# Altium PCB PCB1.PcbDoc
Units mil, origin at the board's own origin, x right, y up, seen from the top; angles counter-clockwise.
Board outline 3346.46 x 3543.31 mil, 4 copper layers (Top Layer, Int1 (PWR), Int2 (GND), Bottom Layer), stack 65.386 mil thick; 29 components, 10 nets, 76 pads, 1 vias.
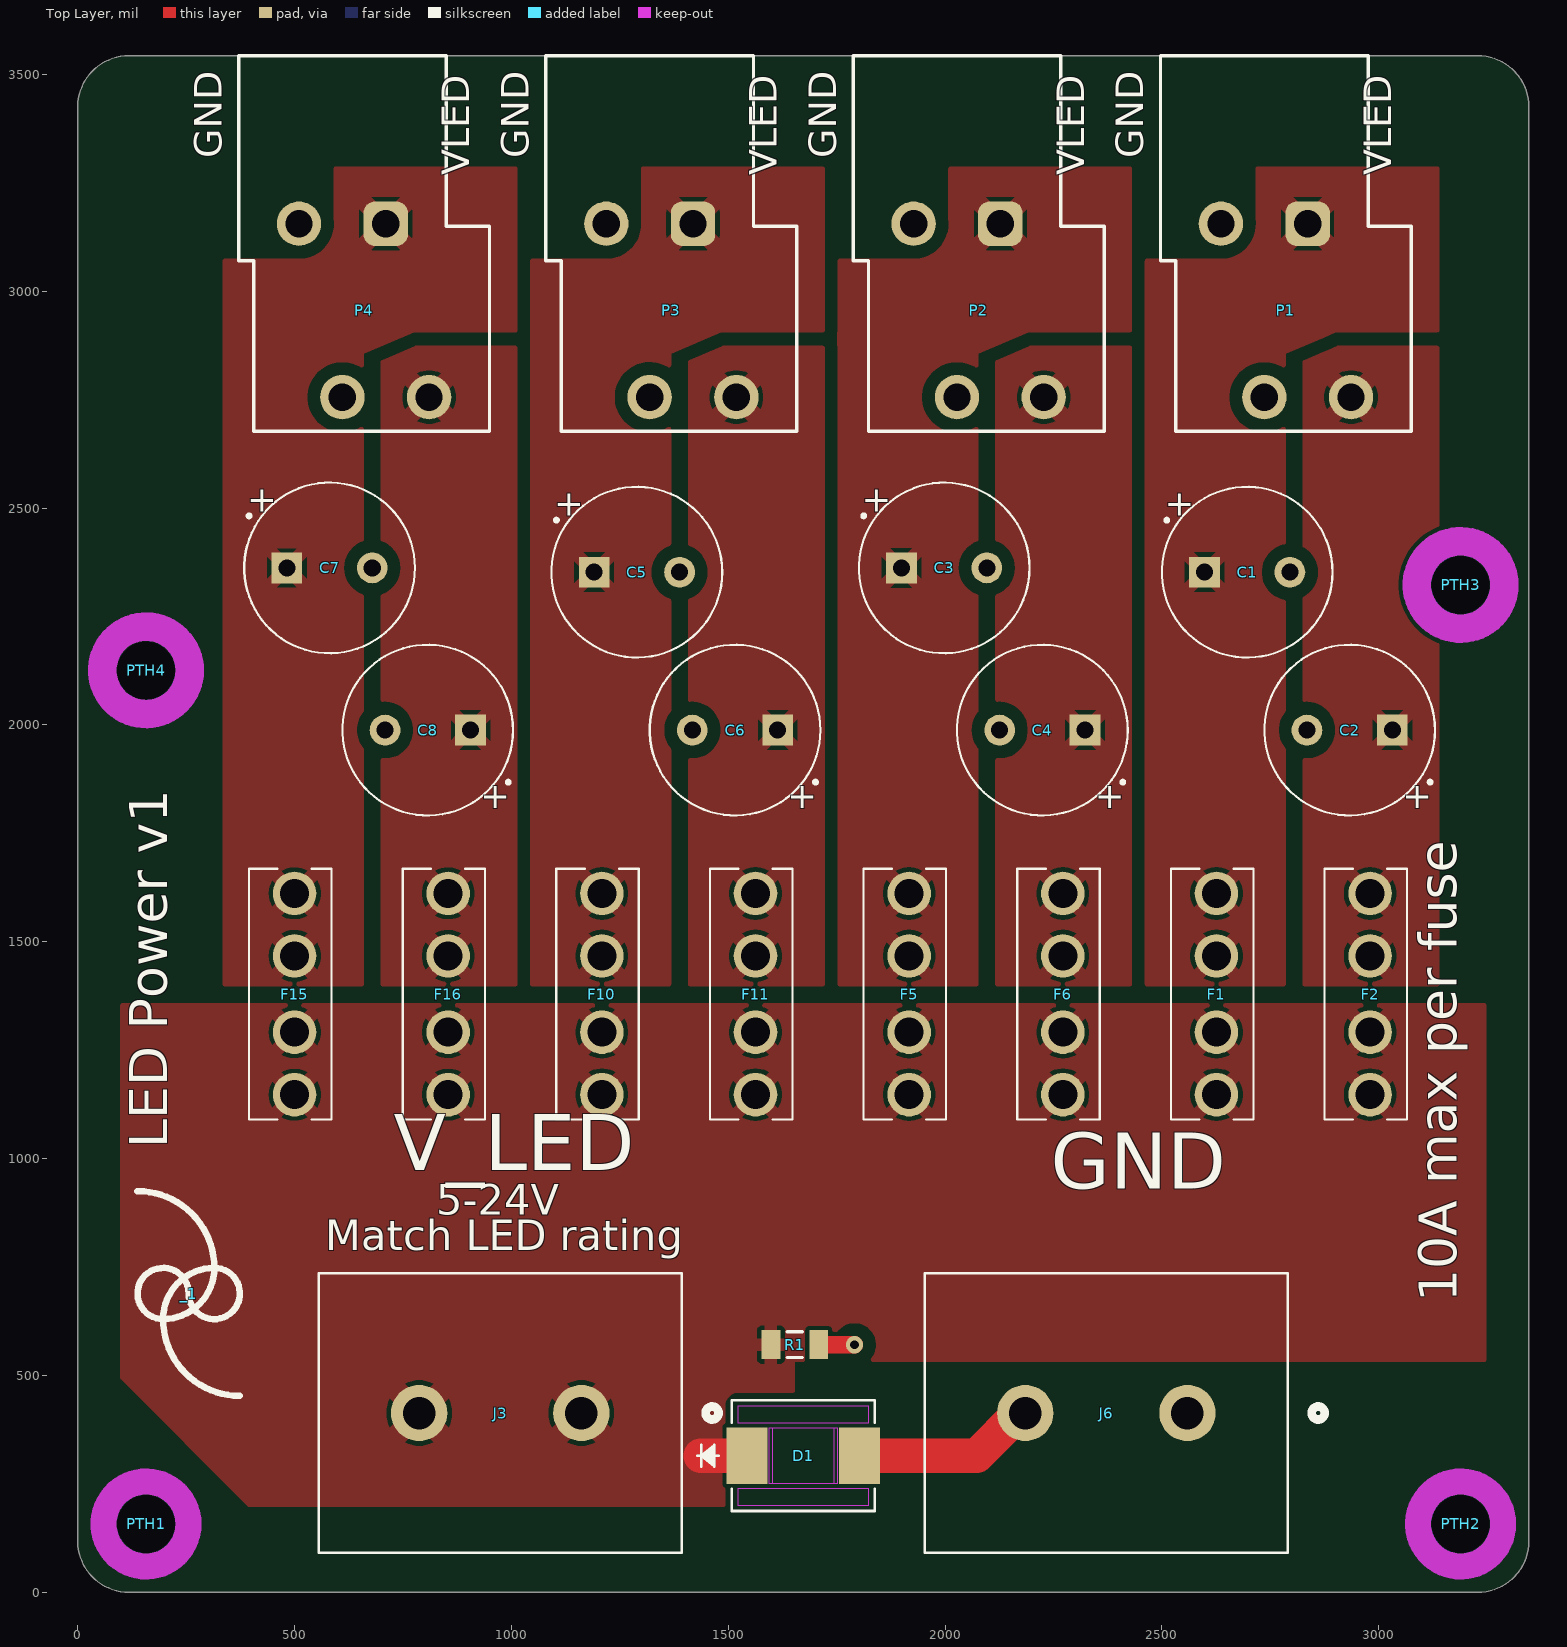
[diagram p0: Top Layer view]
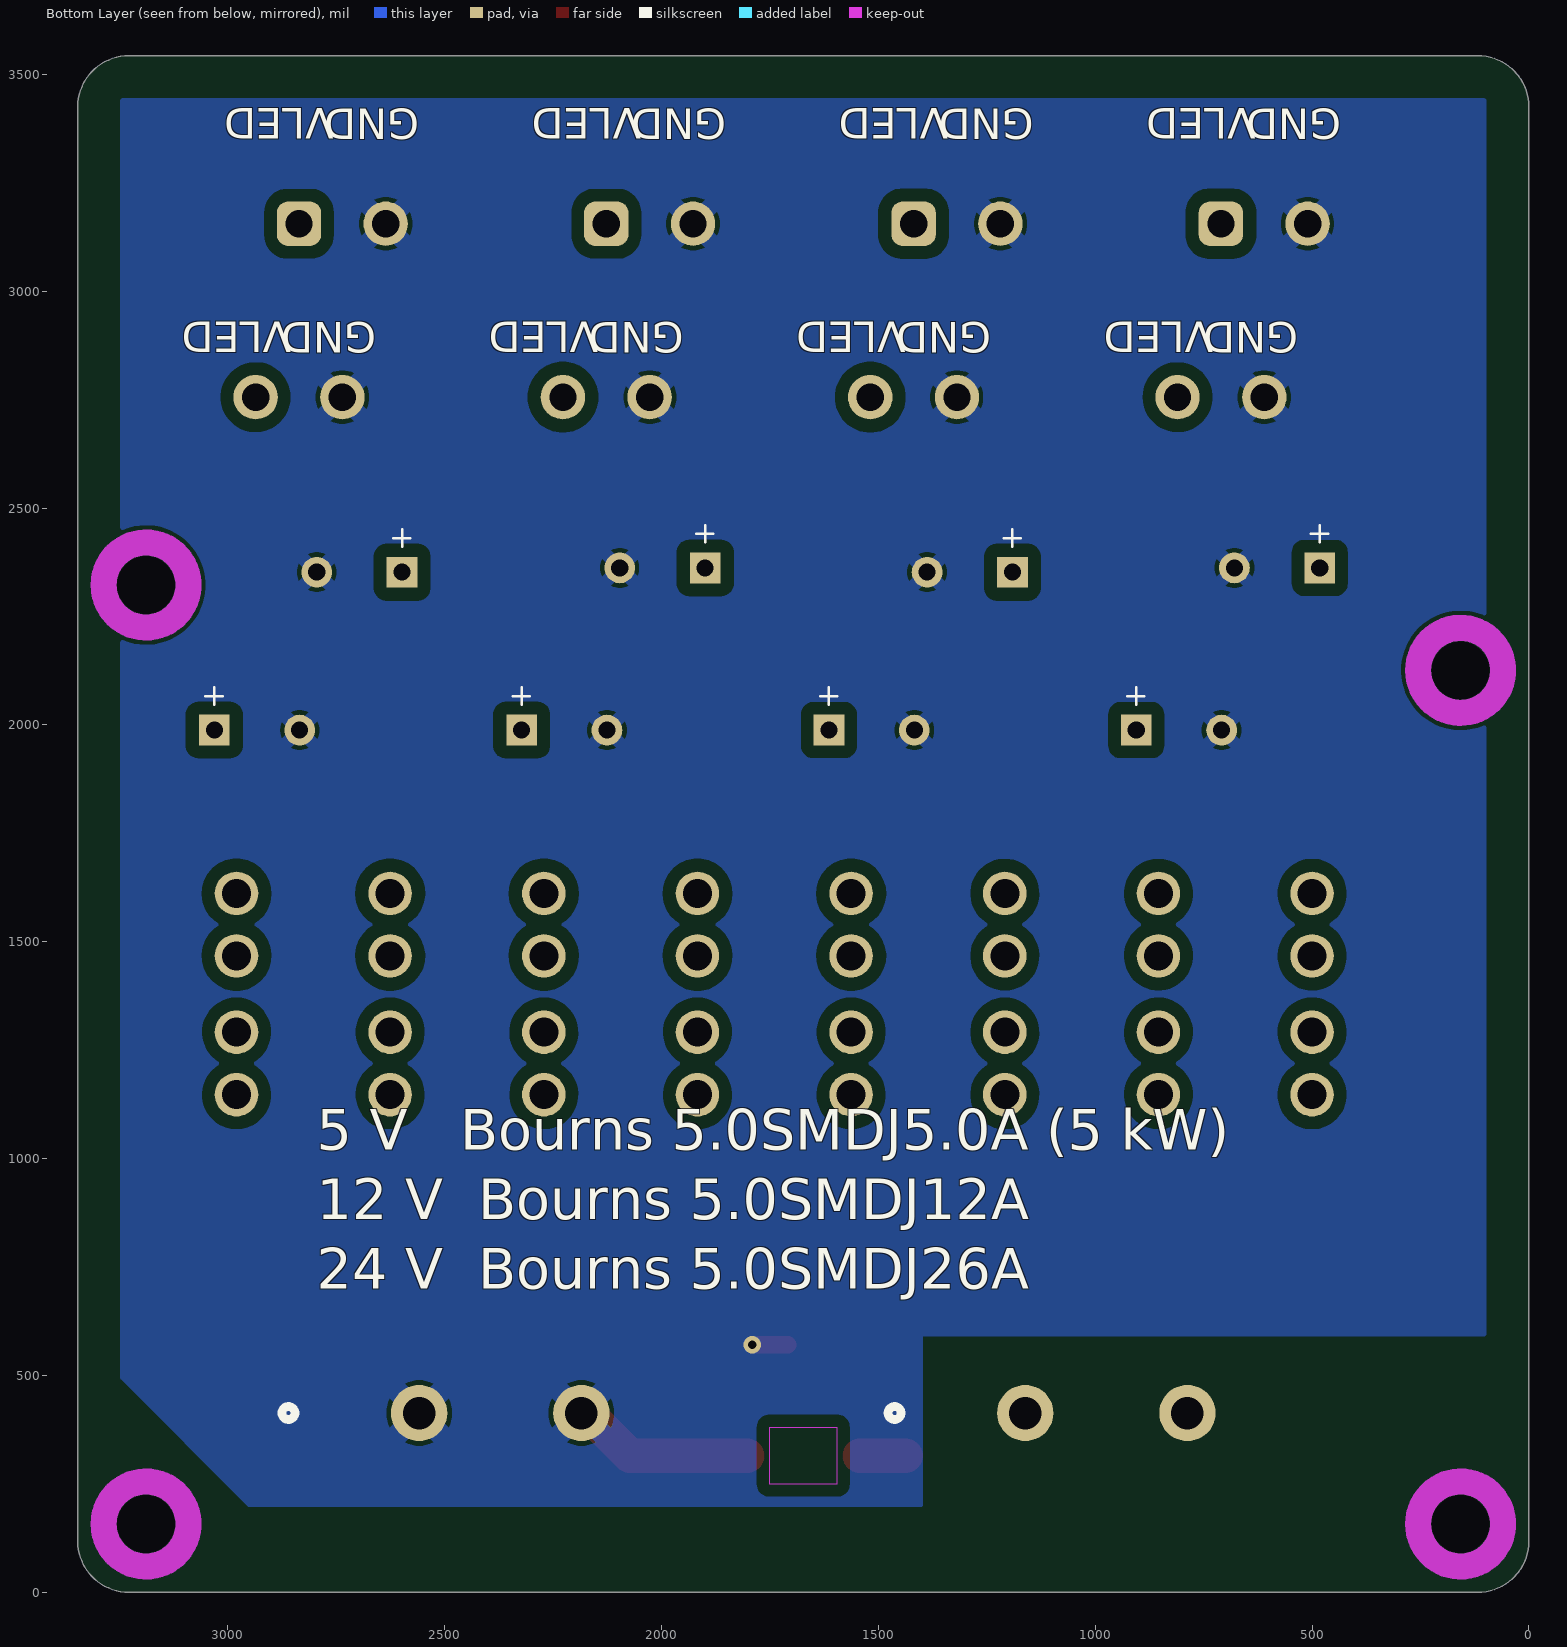
[diagram p1: Bottom Layer view, seen from below]
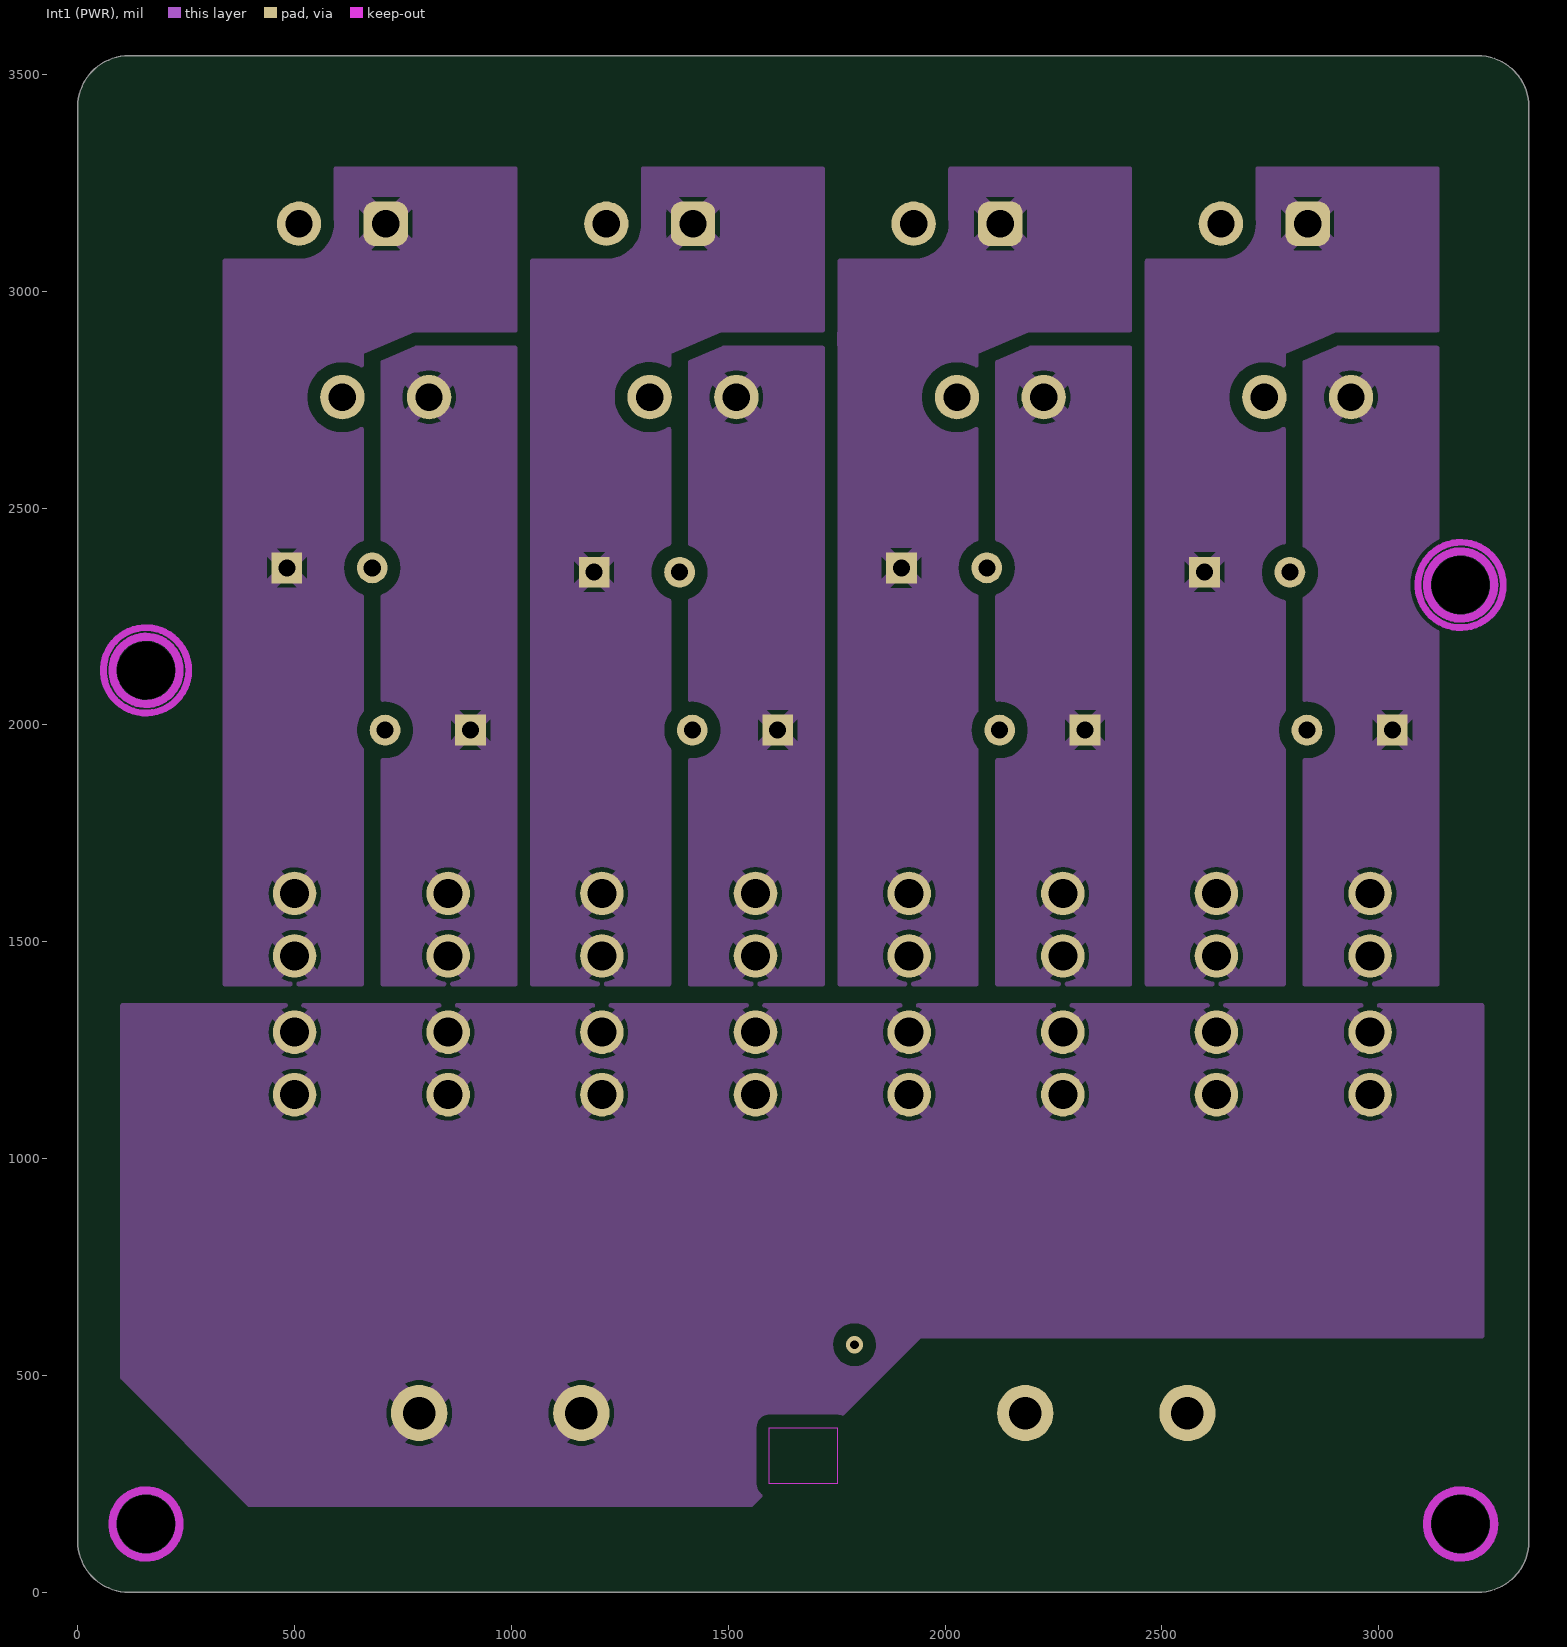
[diagram p2: Int1 (PWR)]
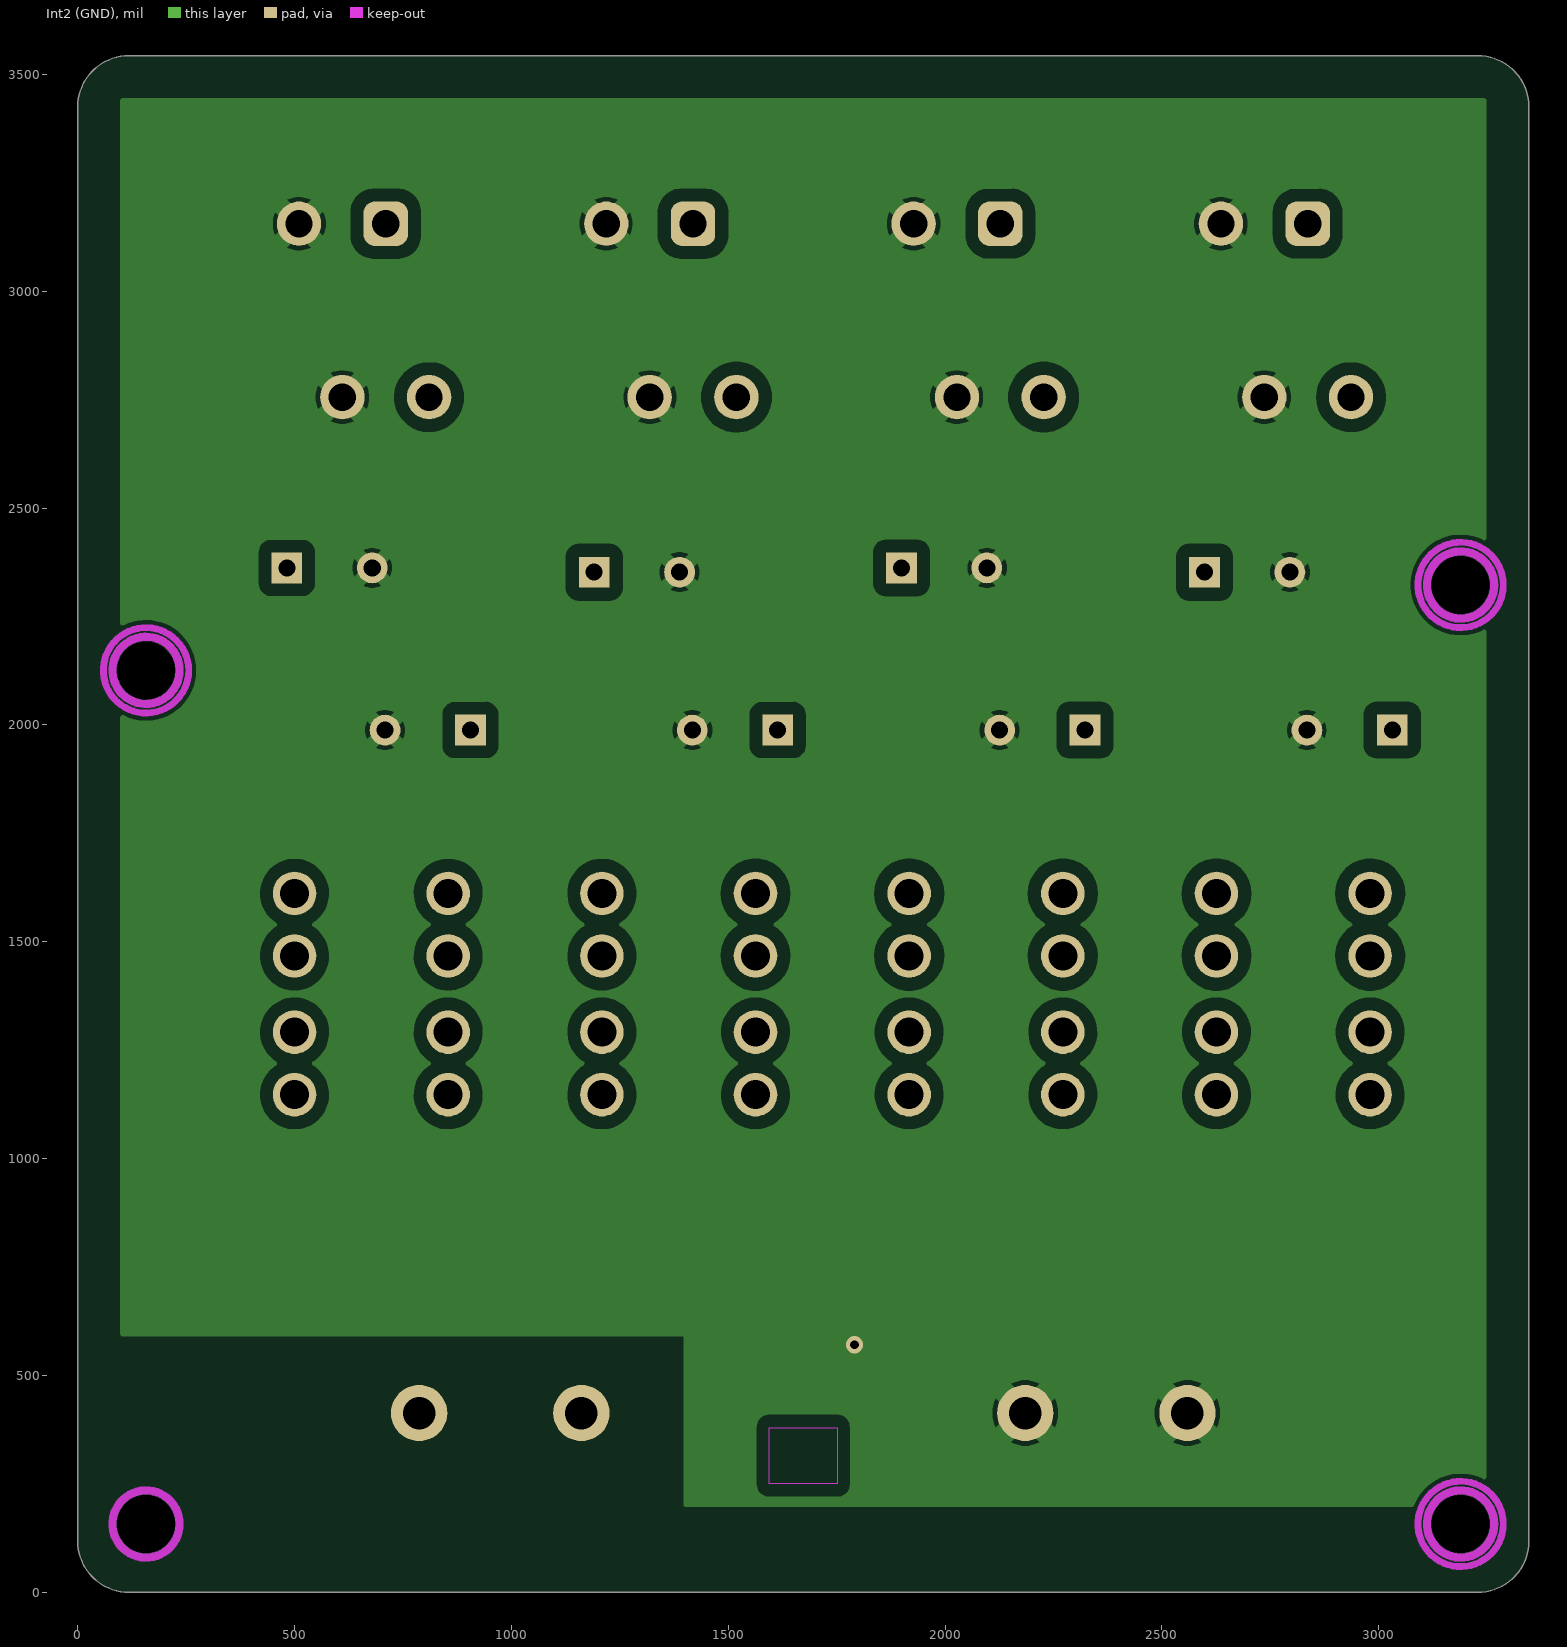
[diagram p3: Int2 (GND)]
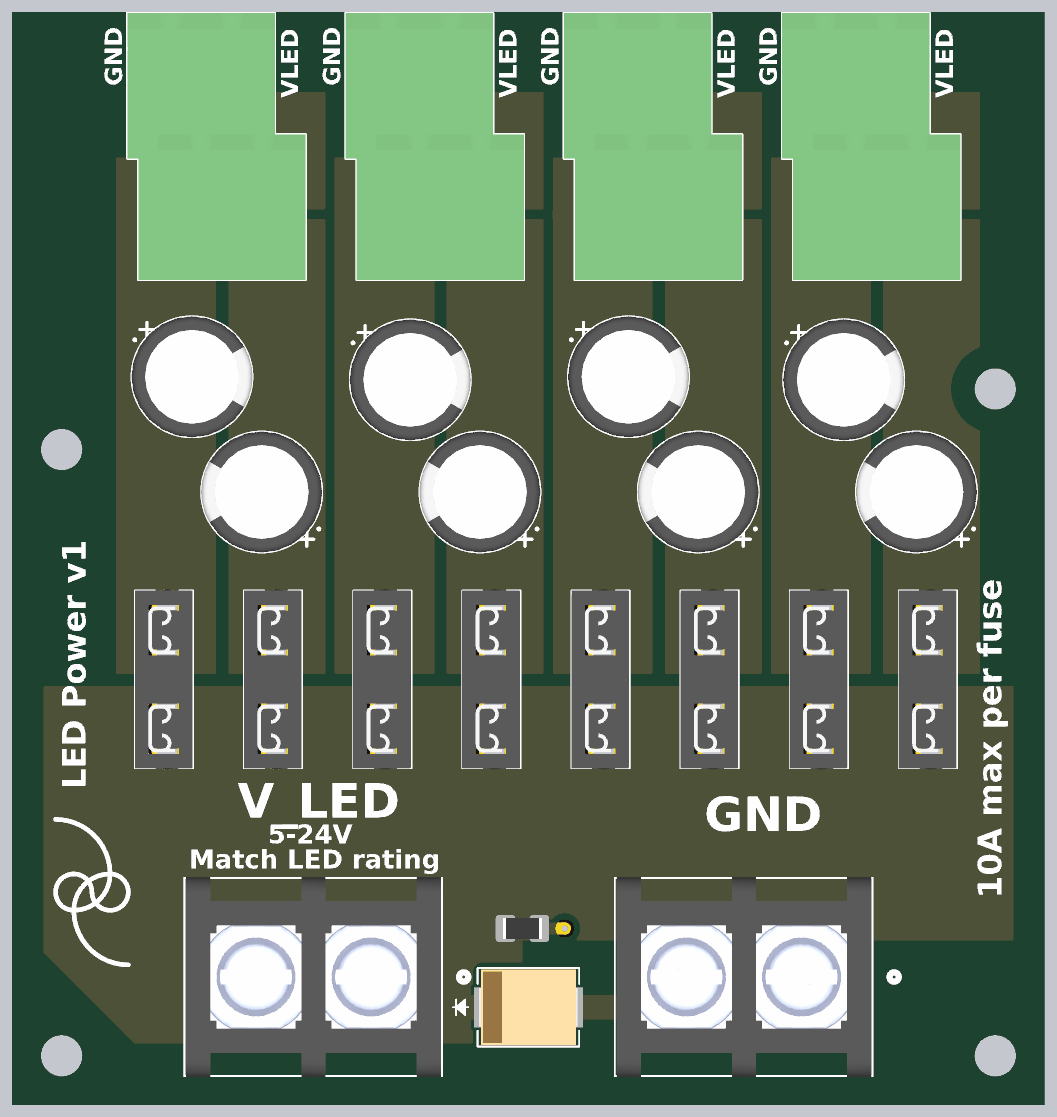
[diagram p4: 3D render of the assembled board from above, using the file's embedded part models]

## Layer stack, top to bottom
Top Solder: solder mask 1, SM-001, Dk 4
Top Layer: signal copper 2.7559
Dielectric 1: prepreg 8.2835, PP-017, Dk 4.3
Int1 (PWR): signal copper 0.689
Dielectric 3: core 41.9291, Core-039, Dk 4.8
Int2 (GND): signal copper 0.689
Dielectric 5: prepreg 8.2835, PP-017, Dk 4.3
Bottom Layer: signal copper 2.7559
Bottom Solder: solder mask 1, SM-001, Dk 4

## Board outline
0,118.11 ccw(c118.11,118.11) 118.11,0 3228.35,0 ccw(c3228.35,118.11) 3346.46,118.11 3346.46,3425.2 ccw(c3228.35,3425.2) 3228.35,3543.31 118.11,3543.31 ccw(c118.11,3425.2) 0,3425.2

## Design rules (kind name [scope] priority, off if disabled: settings)
Clearance [All] p1: gap=10 ignorepadtopadclearanceinfootprint=FALSE except(30: THPad-Fill THPad-Poly THPad-Region Via-Fill Via-Poly Via-Region Fill-Fill Fill-Poly Fill-Region Poly-Poly Poly-Region Region-Region)
DiffPairsRouting [All] p1: maxlimit=10 minlimit=10 mostfreqgap=10 toplayer_minwidth=10 toplayer_maxwidth=10 toplayer_prefwidth=10 midlayer1_minwidth=10 midlayer1_maxwidth=10 midlayer1_prefwidth=10 midlayer2_minwidth=10 midlayer2_maxwidth=10 midlayer2_prefwidth=10 bottomlayer_minwidth=10 bottomlayer_maxwidth=10 bottomlayer_prefwidth=10 maxuncoupledlength=500
HoleSize [All] p1: absolutevalues=TRUE maxlimit=300 minlimit=10 maxpercent=80.000 minpercent=20.000
MinimumAnnularRing [All] p1: minimumring=10
PasteMaskExpansion [All] p1: expansion=10
PlaneClearance [All] p1: clearance=15
PlaneConnect [All] p1: pad.planeconnectstyle=Relief pad.reliefexpansion=20 pad.reliefentries=4 pad.reliefconductorwidth=10 pad.reliefairgap=10 via.planeconnectstyle=Direct via.reliefexpansion=20 via.reliefentries=4 via.reliefconductorwidth=10 via.reliefairgap=10
PolygonConnect PolygonConnect_1 [HasFootprint('OSTYK51102030-Footprint-1')] p1: thpad.connectstyle=Relief thpad.reliefconductorwidth=50 thpad.reliefentries=4 thpad.polygonreliefangle="45 Angle" thpad.airgapwidth=10 smdpad.connectstyle=Relief smdpad.reliefconductorwidth=50 smdpad.reliefentries=4 smdpad.polygonreliefangle="90 Angle" smdpad.airgapwidth=10 via.connectstyle=Direct via.reliefconductorwidth=10 via.reliefentries=4 via.polygonreliefangle="90 Angle" via.airgapwidth=10
PolygonConnect PolygonConnect_2 [HasFootprint('691319510004')] p2: thpad.connectstyle=Relief thpad.reliefconductorwidth=40 thpad.reliefentries=4 thpad.polygonreliefangle="45 Angle" thpad.airgapwidth=10 smdpad.connectstyle=Relief smdpad.reliefconductorwidth=40 smdpad.reliefentries=4 smdpad.polygonreliefangle="90 Angle" smdpad.airgapwidth=10 via.connectstyle=Direct via.reliefconductorwidth=10 via.reliefentries=4 via.polygonreliefangle="90 Angle" via.airgapwidth=10
PolygonConnect [All] p3: thpad.connectstyle=Relief thpad.reliefconductorwidth=30 thpad.reliefentries=4 thpad.polygonreliefangle="45 Angle" thpad.airgapwidth=10 smdpad.connectstyle=Relief smdpad.reliefconductorwidth=30 smdpad.reliefentries=4 smdpad.polygonreliefangle="90 Angle" smdpad.airgapwidth=10 via.connectstyle=Direct via.reliefconductorwidth=10 via.reliefentries=4 via.polygonreliefangle="90 Angle" via.airgapwidth=10
RoutingVias [All] p1: holewidth=10 width=20 viastyle="Through Hole" minholewidth=10 minwidth=20 maxholewidth=10 maxwidth=20
SMDNeckDown [All] p1: percent=100.000
SilkToSolderMaskClearance SilkscreenOverComponentPads [IsPad] p1: minsilkscreentomaskgap=10 clearancetoexposedcopper=TRUE
SolderMaskExpansion [All] p1: expansion=10 istentingtop=FALSE
SupplyNets "Schematic Supply Nets_1" [InNet('V_LED')] p1: voltage=0.000
SupplyNets "Schematic Supply Nets" [InNet('GND')] p2: voltage=0.000
Width [All] p1: maxlimit=250 minlimit=10 preferedwidth=10 midlayer1_maxwidth=10 midlayer2_maxwidth=10 minimp=50.000000 maximp=50.000000 favimp=50.000000
24 further rules are at their usual default settings.

## Components (designator, comment, footprint, x,y, rotation, side; value= is the part's Value field where it differs from the comment)
_1 "Z Logo" "Z Logo 0.5\"" 255.91,688.98 r90 top
C1 "REH1020471M050K" CAP_POL_DIAM10_H22_SPACING5 2696.85,2352.36 r0 top value=470µF
C2 "REH1020471M050K" CAP_POL_DIAM10_H22_SPACING5 2933.07,1988.19 r180 top value=470µF
C3 "REH1020471M050K" CAP_POL_DIAM10_H22_SPACING5 1998.03,2362.2 r0 top value=470µF
C4 "REH1020471M050K" CAP_POL_DIAM10_H22_SPACING5 2224.41,1988.19 r180 top value=470µF
C5 "REH1020471M050K" CAP_POL_DIAM10_H22_SPACING5 1289.37,2352.36 r0 top value=470µF
C6 "REH1020471M050K" CAP_POL_DIAM10_H22_SPACING5 1515.75,1988.19 r180 top value=470µF
C7 "REH1020471M050K" CAP_POL_DIAM10_H22_SPACING5 580.71,2362.2 r0 top value=470µF
C8 "REH1020471M050K" CAP_POL_DIAM10_H22_SPACING5 807.09,1988.19 r180 top value=470µF
D1 "5.0SMDJ5.0A" SMDJ_DO-214AB 1673.23,314.96 r0 top
F1 "3544-2" 3544-2-Footprint-1 2625.98,1379.53 r270 top
F2 "3544-2" 3544-2-Footprint-1 2980.32,1379.53 r270 top
F5 "3544-2" 3544-2-Footprint-1 1917.32,1379.53 r270 top
F6 "3544-2" 3544-2-Footprint-1 2271.65,1379.53 r270 top
F10 "3544-2" 3544-2-Footprint-1 1208.66,1379.53 r270 top
F11 "3544-2" 3544-2-Footprint-1 1562.99,1379.53 r270 top
F15 "3544-2" 3544-2-Footprint-1 500,1379.53 r270 top
F16 "3544-2" 3544-2-Footprint-1 854.33,1379.53 r270 top
J3 "OSTYK51102030" OSTYK51102030-Footprint-1 1161.42,413.39 r180 top
J6 "OSTYK51102030" OSTYK51102030-Footprint-1 2559.06,413.39 r180 top
P1 "691319510004" 691319510004 2786.22,3110.24 r180 top
P2 "691319510004" 691319510004 2077.56,3110.24 r180 top
P3 "691319510004" 691319510004 1368.9,3110.24 r180 top
P4 "691319510004" 691319510004 660.24,3110.24 r180 top
PTH1 "Mounting Hole NPTH" "Mounting Hole M3 No Washer NPTH" 157.48,157.48 r0 top
PTH2 "Mounting Hole NPTH" "Mounting Hole M3 No Washer NPTH" 3188.98,157.48 r0 top
PTH3 "Mounting Hole NPTH" "Mounting Hole M3 No Washer NPTH" 3188.98,2322.83 r0 top
PTH4 "Mounting Hole NPTH" "Mounting Hole M3 No Washer NPTH" 157.48,2125.98 r0 top
R1 "RC1206FR-0710KL" RESC3116X06N_1206MED 1653.54,570.87 r0 top value=10k

## Footprints (in the part's own frame and the unit in brackets; to place one, negate y for a bottom-side part, rotate by r counter-clockwise, add the part's x,y. Pads: shape width x height; smd on the part's side, far side on the other; paste and mask are expansions set on the pad)
3544-2-Footprint-1 [mm]
  round 2.55 hole 1.7: 1(-5.895,0) 2(-2.235,0) 3(2.235,0) 4(5.895,0)
  silkscreen extent -7.34,-2.67 7.34,2.16, body extent -7.34,-2.67 7.34,2.08, height 8.83
691319510004 [mm] "Double Level Horizontal Male PCB Header with closed Flanges, pitch 5.08mm, 04p"
  rrect50% 2.6x2.6 hole 1.6: 1(-1.27,-1.16)
  round 2.6 hole 1.6: 2(3.81,-1.16) 3(-3.81,9) 4(1.27,9)
  silkscreen extent -7.35,-11 7.35,11, body extent -7.35,-11 7.35,11, height 23.75
CAP_POL_DIAM10_H22_SPACING5 [mm] "Diameter 8mm / Height 22mm / Lead Spacing 5mm"
  rect 1.8x1.8 hole 1: 1(-2.5,0)
  round 1.8 hole 1: 2(2.5,0)
  silkscreen extent -5,-5 5,5, body extent -5,-5 5,5, height 20
"Mounting Hole M3 No Washer NPTH" [mil] "Mounting Hole"
  round 0 hole 134 unplated: 1(0,0)
  Top Layer keep-out circle w60: c0,0 r98
  Bottom Layer keep-out circle w60: c0,0 r98
  Keep-Out Layer circle w19: c0,0 r77.5
OSTYK51102030-Footprint-1 [mil]
  round 130 hole 75 paste-99999 mask+0: 1(0,0) 2(374.02,0)
  silkscreen extent -316,-322 606,322, body extent -227,-325 599,325, height 733
RESC3116X06N_1206MED [mm] "Chip Resistor, 2-Leads, Body 3.10x1.60mm, IPC Medium Density"
  rect 1.1x1.7 smd: 1(-1.4,0) 2(1.4,0)
  silkscreen extent -0.45,-0.75 0.45,0.75, body extent -1.6,-0.85 1.6,0.85, height 0.65
SMDJ_DO-214AB [mm]
  rect 2.4x3.3 smd paste+0 mask+0: 1(-3.3,0) 2(3.3,0)
  Top Layer keep-out region: -1.778,-1.651 -1.778,1.651 1.778,1.651 1.778,-1.651
  Top Layer keep-out region: -3.81,1.905 -3.81,2.921 3.81,2.921 3.81,1.905
  Top Layer keep-out region: 3.81,-1.905 3.81,-2.921 -3.81,-2.921 -3.81,-1.905
  Keep-Out Layer region: -1.981,-1.651 -1.981,1.651 1.981,1.651 1.981,-1.651
  silkscreen extent -6.22,-3.24 4.19,3.24, body extent -4.06,-3.11 4.06,3.11, height 2.67
"Z Logo 0.5\"" [mil]
  silkscreen extent -236,-118 236,118

## Part data
_1: library part CMP-00028-00046-1, "Z logo silkscreen"
C1 C2 C3 C4 C5 C6 C7 C8: library part CMP-001-00166-2, "CAP ALUM 470UF 20% 50V RADIAL TH", Capacitor Type=Aluminium, Case/Package=Radial, Max Operating Temperature=-40°C, Min Operating Temperature=125°C, Tolerance=20%, Voltage Rating=50V, Mounting Technology="Through Hole", Pins=2, RoHS Compliant=Yes
D1: library part CMP-004-00056-1, "5V Unidirectional 5kW TVS Diode, 9.2V Vwm, 6.4V Vbr, SMC(DO-214AB), SMD", Forward Voltage=5V, Max Operating Temperature=150°C, Max Surge Current=326.1A, Min Operating Temperature=-55°C, Mounting Technology="Surface Mount", Pins=2
F1 F2 F5 F6 F10 F11 F15 F16: library part CMP-005-00025-1, "Auto blade fuse holder; for 2.8x0.8mm mini blade fuses ATM; 20A; THT", Current Rating=30A, Max Operating Temperature=145°C, Min Operating Temperature=-50°C, Mounting Technology="PCB, Through Hole, Vertical"
J3 J6: library part CMP-002-00246-1, "Conn Terminal Block 2 POS 9.5mm Solder ST Thru-Hole 30A", Max Current Rating=20A, Max Operating Temperature=115°C, Min Operating Temperature=-40°C, Voltage Rating=300V, Mounting Technology=Screw, Pins=2
P1 P2 P3 P4: library part CMP-002-00244-2, "Terminal Block, 5.08MM, Dbl Lvl Horizontal Male Pcb Header W/closed Flange, 4PI", Max Current Rating=10A, Max Operating Temperature=105°C, Min Operating Temperature=-40°C, Pins=4
PTH1 PTH2 PTH3 PTH4: library part CMP-00028-00043-4
R1: library part CMP-009-00344-1, "Fixed Resistor, Metal Glaze/thick Film, 0.25W, 20000ohm, 200V, 1% +/-Tol, 100ppm/Cel, Surface Mount, 1206", Case/Package=1206, Max Operating Temperature=155°C, Min Operating Temperature=-55°C, Power=250mW, Tolerance=1%, Voltage Rating=200V, Mounting Technology="Surface Mount", Pins=2, RoHS Compliant=Yes

## Via types
v1: diameter 40, hole 20, Top Layer to Bottom Layer, 1 vias

## Nets (pads, with @x,y where several pads share a name; then routed paths per layer and width w, separated by ;. In a path a pad name is that pad's centre, name@x,y a point inside that pad or via, vN(x,y) a via of type N, cw(c..) or ccw(c..) an arc to the next point about the centre after c; other vN are vias at no path point)
GND: C1.2 C2.2 C3.2 C4.2 C5.2 C6.2 C7.2 C8.2 D1.2 J6.1 J6.2 P1.2 P1.4 P2.2 P2.4 P3.2 P3.4 P4.2 P4.4 R1.2 | length 505.3
  Top Layer w40: R1.2 v1(1791.34,570.87)
  Top Layer w80: D1.2 2073.08,314.96 2171.51,413.39 J6.2
NetC1_1: C1.1 F1.1 F1.2 P1.1
NetC2_1: C2.1 F2.1 F2.2 P1.3
NetC3_1: C3.1 F5.1 F5.2 P2.1
NetC4_1: C4.1 F6.1 F6.2 P2.3
NetC5_1: C5.1 F10.1 F10.2 P3.1
NetC6_1: C6.1 F11.1 F11.2 P3.3
NetC7_1: C7.1 F15.1 F15.2 P4.1
NetC8_1: C8.1 F16.1 F16.2 P4.3
V_LED: D1.1 F1.3 F1.4 F2.3 F2.4 F5.3 F5.4 F6.3 F6.4 F10.3 F10.4 F11.3 F11.4 F15.3 F15.4 F16.3 F16.4 J3.1 J3.2 R1.1 | length 106.3
  Top Layer w80: 1437.01,314.96 D1.1
pads on no net: PTH1.1 PTH2.1 PTH3.1 PTH4.1

## Polygon pours and split planes (outlines as drawn)
V_LED on Top Layer "V_LED_L01_P000" (solid, pour order 0): 1653.54,531.5 1653.54,196.85 393.7,196.85 98.43,492.13 98.43,1358.27 3248.03,1358.27 3248.03,531.5
NetC1_1 on Top Layer "NETC1_1_L01_P036" (solid, pour order 36): 2716.54,3287.4 3139.76,3287.4 3139.76,2905.51 2901.57,2905.51 2785.43,2855.74 2785.43,2440.94 2785.43,2322.83 2785.43,1397.64 2460.63,1397.64 2460.63,3074.8 2634.93,3074.8 2716.54,3149.61
NetC2_1 on Top Layer "NETC2_1_L01_P037" (solid, pour order 37): 2824.8,2874.02 3139.76,2874.02 3139.76,1397.64 2824.8,1397.64 2824.8,2066.93
NetC4_1 on Top Layer "NETC4_1_L01_P035" (solid, pour order 35): 2116.14,2874.02 2431.1,2874.02 2431.1,1397.64 2116.14,1397.64 2116.14,2066.93
NetC3_1 on Top Layer "NETC3_1_L01_P034" (solid, pour order 34): 2007.87,3287.4 2431.1,3287.4 2431.1,2905.51 2192.91,2905.51 2076.77,2855.74 2076.77,2440.94 2076.77,2322.83 2076.77,1397.64 1751.97,1397.64 1751.97,3074.8 1926.27,3074.8 2007.87,3149.61
NetC6_1 on Top Layer "NETC6_1_L01_P033" (solid, pour order 33): 1407.48,2874.02 1722.44,2874.02 1722.44,1397.64 1407.48,1397.64 1407.48,2066.93
NetC5_1 on Top Layer "NETC5_1_L01_P032" (solid, pour order 32): 1299.21,3287.4 1722.44,3287.4 1722.44,2905.51 1484.25,2905.51 1368.11,2855.74 1368.11,2440.94 1368.11,2322.83 1368.11,1397.64 1043.31,1397.64 1043.31,3074.8 1217.61,3074.8 1299.21,3149.61
NetC7_1 on Top Layer "NETC7_1_L01_P002" (solid, pour order 2): 590.55,3287.4 1013.78,3287.4 1013.78,2905.51 775.59,2905.51 659.45,2855.74 659.45,2440.94 659.45,2322.83 659.45,1397.64 334.65,1397.64 334.65,3074.8 508.95,3074.8 590.55,3149.61
NetC8_1 on Top Layer "NETC8_1_L01_P003" (solid, pour order 3): 698.82,2874.02 1013.78,2874.02 1013.78,1397.64 698.82,1397.64 698.82,2066.93
GND on Int2 (GND) "GND_L03_P018" (solid, pour order 18): 1397.64,590.55 1397.64,196.85 3248.03,196.85 3248.03,3444.88 98.42,3444.88 98.43,590.55
NetC7_1 on Int1 (PWR) "NETC7_1_L02_P038" (solid, pour order 38): 590.55,3287.4 1013.78,3287.4 1013.78,2905.51 775.59,2905.51 659.45,2855.74 659.45,2440.94 659.45,2322.83 659.45,1397.64 334.65,1397.64 334.65,3074.8 508.95,3074.8 590.55,3149.61
NetC8_1 on Int1 (PWR) "NETC8_1_L02_P039" (solid, pour order 39): 698.82,2874.02 1013.78,2874.02 1013.78,1397.64 698.82,1397.64 698.82,2066.93
NetC5_1 on Int1 (PWR) "NETC5_1_L02_P040" (solid, pour order 40): 1299.21,3287.4 1722.44,3287.4 1722.44,2905.51 1484.25,2905.51 1368.11,2855.74 1368.11,2440.94 1368.11,2322.83 1368.11,1397.64 1043.31,1397.64 1043.31,3074.8 1217.61,3074.8 1299.21,3149.61
NetC6_1 on Int1 (PWR) "NETC6_1_L02_P041" (solid, pour order 41): 1407.48,2874.02 1722.44,2874.02 1722.44,1397.64 1407.48,1397.64 1407.48,2066.93
NetC3_1 on Int1 (PWR) "NETC3_1_L02_P042" (solid, pour order 42): 2007.87,3287.4 2431.1,3287.4 2431.1,2905.51 2192.91,2905.51 2076.77,2855.74 2076.77,2440.94 2076.77,2322.83 2076.77,1397.64 1751.97,1397.64 1751.97,3074.8 1926.27,3074.8 2007.87,3149.61
NetC4_1 on Int1 (PWR) "NETC4_1_L02_P043" (solid, pour order 43): 2116.14,2874.02 2431.1,2874.02 2431.1,1397.64 2116.14,1397.64 2116.14,2066.93
NetC1_1 on Int1 (PWR) "NETC1_1_L02_P044" (solid, pour order 44): 2716.54,3287.4 3139.76,3287.4 3139.76,2905.51 2901.57,2905.51 2785.43,2855.74 2785.43,2440.94 2785.43,2322.83 2785.43,1397.64 2460.63,1397.64 2460.63,3074.8 2634.93,3074.8 2716.54,3149.61
NetC2_1 on Int1 (PWR) "NETC2_1_L02_P045" (solid, pour order 45): 2824.8,2874.02 3139.76,2874.02 3139.76,1397.64 2824.8,1397.64 2824.8,2066.93
V_LED on Int1 (PWR) "V_LED_L02_P046" (solid, pour order 46): 1943.82,585.55 1555.12,196.85 393.7,196.85 98.43,492.13 98.43,1358.27 3243.03,1358.27 3243.03,585.55
GND on Bottom Layer "GND_L04_P001" (solid, pour order 1): 1397.64,590.55 1397.64,196.85 2952.76,196.85 3248.03,492.13 3248.03,3444.88 98.42,3444.88 98.43,590.55

## Keep-outs
Top Layer:
  circle w15.75: c157.48,2125.98 r125.98
  circle w15.75: c3188.98,2322.83 r125.98
Int1 (PWR):
  circle w15.75: c157.48,2125.98 r98.43
  circle w15.75: c3188.98,2322.83 r98.43
Int2 (GND):
  circle w15.75: c3188.98,157.48 r98.43
  circle w15.75: c157.48,2125.98 r98.43
  circle w15.75: c3188.98,2322.83 r98.43

## Other copper
Top Layer:
  text "'.Layer_Name'" at -1217.89,457.65 h78.74
Bottom Layer:
  text "'.Layer_Name'" at -1217.89,221.42 h78.74

## Silkscreen, mask and mechanical layers (free items; w line width, h text height)
Top Overlay:
  text "GND" at 353.47,3307.09 h110 r90
  text "GND" at 1062.13,3307.09 h110 r90
  text "GND" at 1770.79,3307.09 h110 r90
  text "GND" at 2479.45,3307.09 h110 r90
  text "VLED" at 925.2,3267.77 h110 r90
  text "VLED" at 1633.86,3267.77 h110 r90
  text "VLED" at 2342.52,3267.77 h110 r90
  text "VLED" at 3051.18,3267.77 h110 r90
  text "LED Power v1" at 235.04,1023.69 h150 r90
  text "V_LED" at 728.45,930.8 h220
  text "GND" at 2244.09,887.56 h220
  text "5-24V" at 826.83,847.29 h120
  text "Match LED rating" at 570.92,765.79 h120
  text "10A max per fuse" at 3208.43,669.36 h150 r90
  text "'.Layer_Name'" at -745.45,457.65 h78.74
Bottom Overlay:
  lines w5.91: 463.37,2440.7 502.74,2440.7 ; 482.28,2421.26 482.28,2460.63 ; 886.6,2066.68 925.97,2066.68 ; 905.51,2047.24 905.51,2086.61 ; 1172.03,2430.86 1211.4,2430.86 ; 1190.94,2411.42 1190.94,2450.79 ; 1595.26,2066.68 1634.63,2066.68 ; 1614.17,2047.24 1614.17,2086.61 ; 1880.69,2440.7 1920.06,2440.7 ; 1899.61,2421.26 1899.61,2460.63 ; 2303.92,2066.68 2343.29,2066.68 ; 2322.83,2047.24 2322.83,2086.61 ; 2579.51,2430.86 2618.88,2430.86 ; 2598.43,2411.42 2598.43,2450.79 ; 3012.58,2066.68 3051.95,2066.68 ; 3031.5,2047.24 3031.5,2086.61
  text "VLED" at 629.98,3444.88 h120 r180
  text "VLED" at 1338.64,3444.88 h120 r180
  text "VLED" at 2047.3,3444.88 h120 r180
  text "VLED" at 2755.96,3444.88 h120 r180
  text "GND" at 433.07,3443.94 h120 r180
  text "GND" at 1141.73,3443.94 h120 r180
  text "GND" at 1850.39,3443.94 h120 r180
  text "GND" at 2559.06,3443.94 h120 r180
  text "VLED" at 728.4,2952.76 h120 r180
  text "VLED" at 1437.06,2952.76 h120 r180
  text "VLED" at 2145.72,2952.76 h120 r180
  text "VLED" at 2854.39,2952.76 h120 r180
  text "GND" at 531.5,2951.81 h120 r180
  text "GND" at 1240.16,2951.81 h120 r180
  text "GND" at 1948.82,2951.81 h120 r180
  text "GND" at 2657.48,2951.81 h120 r180
  text "5 V   Bourns 5.0SMDJ5.0A (5 kW) / 12 V  Bourns 5.0SMDJ12A / 24 V  Bourns 5.0SMDJ26A" at 2795.28,669.29 h160
  text "'.Layer_Name'" at -745.45,221.42 h78.74
Top Paste:
  text "'.Layer_Name'" at -745.45,536.39 h78.74
Bottom Paste:
  text "'.Layer_Name'" at -745.45,142.68 h78.74
Top Solder:
  text "'.Layer_Name'" at -745.45,378.91 h78.74
Bottom Solder:
  text "'.Layer_Name'" at -745.45,300.17 h78.74
Board:
  the board outline again, w5.91
Drill Drawing:
  text "'.Layer_Name'" at -1217.89,142.68 h78.74

## Text inside footprints (layer, text, board x,y; h text height)
C1: Top Overlay "+" at 2506.85,2482.37 h60
C2: Top Overlay "+" at 3123.07,1858.19 h60 r180
C3: Top Overlay "+" at 1808.03,2492.21 h60
C4: Top Overlay "+" at 2414.41,1858.19 h60 r180
C5: Top Overlay "+" at 1099.37,2482.37 h60
C6: Top Overlay "+" at 1705.75,1858.19 h60 r180
C7: Top Overlay "+" at 390.71,2492.21 h60
C8: Top Overlay "+" at 997.09,1858.19 h60 r180